# Altium PCB 8088NoteBook2.PcbDoc (part 2 of 2)
Units mm, origin at the board's own origin, x right, y up, seen from the top; angles counter-clockwise.
Board outline 60 x 75.5 mm, 4 copper layers (Top Layer, MidLayer1, GND, Bottom Layer); 109 components, 230 nets, 889 pads, 406 vias.
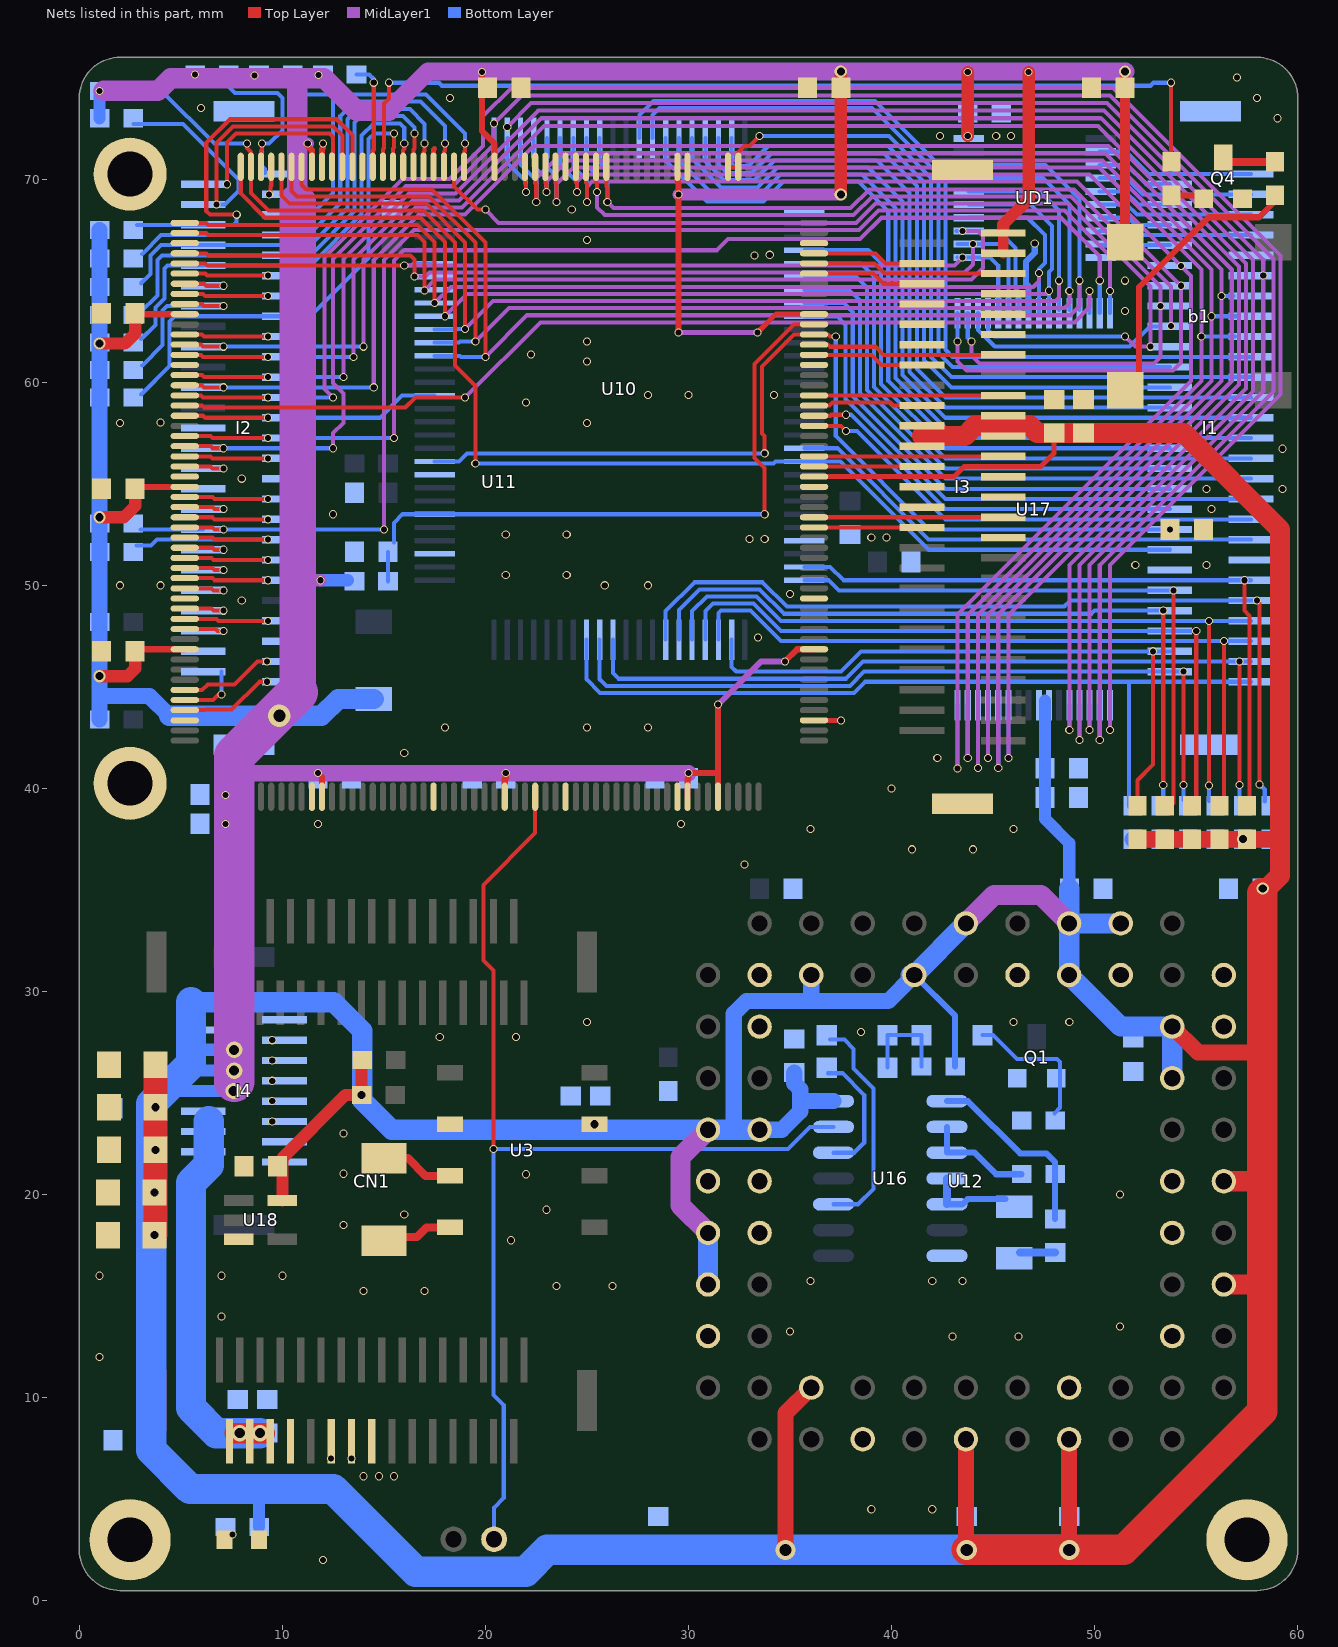
[diagram p4: the nets of this part, all layers, seen from the top]

## Via types
v1: diameter 0.4, hole 0.3, Top Layer to Bottom Layer, 379 vias
v2: diameter 0.6, hole 0.4, Top Layer to Bottom Layer, 17 vias
v3: diameter 0.8, hole 0.5, Top Layer to Bottom Layer, 5 vias
v4: diameter 1, hole 0.6, Top Layer to Bottom Layer, 3 vias
v5: diameter 1.1, hole 0.6, Top Layer to Bottom Layer, 1 vias
v6: diameter 0.55, hole 0.4, Top Layer to Bottom Layer, 1 vias

## Nets (pads, with @x,y where several pads share a name; then routed paths per layer and width w, separated by ;. In a path a pad name is that pad's centre, name@x,y a point inside that pad or via, vN(x,y) a via of type N, cw(c..) or ccw(c..) an arc to the next point about the centre after c; other vN are vias at no path point) (continued)
GND: C1.2 C3.2 C5.1 C8.2 C9.2 CN1.22 CN1.23 CN1.24 CV1.2 CV2.2 CV3.2 CV4.2 CV6.2 CV8.2 CV9.2 CV10.2 CV12.2 CV13.2 CV14.2 CV15.2 CV16.2 CV18.2 CV19.2 CV20.2 CV21.2 CV22.2 CV23.2 CV24.2 CV25.2 CV27.2 CV28.2 CV29.2 CV30.2 CV31.2 CV32.2 CV33.2 CV35.2 CV36.2 CV39.2 CV40.2 CV42.2 CV43.2 CV44.2 CV49.2 CV50.2 I1.0 I1.5 I1.20 I1.32 I2.0 I2.16 I2.24 I2.28 I2.36 I2.39 I3.0 I3.11 I3.13 I3.14 I3.21 I3.22 I3.23 I3.30 I3.31 I3.32 I3.39 I3.40 I4.1 I4.2 I4.3 I4.4 I4.5 I4.6 I4.7 I4.8 LED1.2 M1.1 M2.1 M3.1 M4.1 Q1.E Q4.E R11.1 R22.1 U3.2 U10.3 U10.9 U10.52 U10.77 U11.3 U11.15 U11.26 U11.38 U11.50 U11.60 U11.72 U11.85 U11.96 U11.107 U11.119 U11.130 U11.142 U11.154 U11.164 U11.176 U11.189 U11.200 U12.5 U12.14 U12.21 U12.25 U12.27 U12.32 U12.34 U12.38 U12.42 U12.53 U12.55 U12.60 U12.61 U12.63 U12.66 U16.7 U17.24 U18.3 UD1.10 | length 6.8
  Top Layer w0.25: U11.189@17.45,70.608 17.45,71.464 17.492,71.506 ; U11.107@36.475,43.35 v1(37.5,43.35)
  Top Layer w0.3: U11.200@11.95,70.608 11.95,71.475 12,71.525 v1(12,71.75)
  Bottom Layer w0.3: U17.24@46.75,63.4 46.75,64.725 46.625,64.85 46.625,65.95 47.05,66.375 v1(47.05,66.825)
  other v1: 12,2 39,4.5 42,4.5 14,6.125 14.75,6.125 15.5,6.125 12.4,7 13.4,7 1,12 43,13 46.25,13 35,13.25 51.25,13.5 7,14 14,15.25 17,15.25 23.5,15.5 26.25,15.5 36,15.75 42,15.75 43.5,15.75 1,16 7,16 10,16 21.25,17.75 13,18.5 16,19.025 23,19.25 51.25,20 22,21 13,21.025 13,23 9.5,23.6 9.5,24.6 9.5,25.6 9.5,26.6 9.5,27.6 17.75,27.75 21.5,27.75 38.5,28 25,28.5 46,28.5 48.75,28.5 32.75,36.25 41,37 44,37 36,38 46,38 11.75,38.25 29.625,38.25 40,40 42.25,41.5 16,41.75 18,43 25,43 28,43 33.425,47.425 8,49.25 35,49.575 2,50 4,50 25.875,50 28,50 21,50.5 24,50.5 52,51 55.5,51 33,52.275 33.75,52.275 39,52.35 39.75,52.35 21,52.5 24,52.5 12.5,53.5 55.75,53.75 55.5,54.75 59.25,54.75 8,55.25 59.25,56.725 2,58 25,58 4,58.025 22,59 28,59.375 30,59.375 34.2,59.375 25,61.025 22.25,61.375 25,62 51.5,63.5 51.5,65 33.25,66.25 34,66.275 25,67 24.25,68.5 42.375,72.125 45.15,72.125 45.875,72.125 59,73 6,73.5 18.25,74 58,74 57,75
ISA_*DACK0: I2.47 R39.2 U11.192 | length 22.9
  Top Layer w0.2: U11.192@15.95,70.608 15.95,71.425 16,71.475 v1(16,71.75)
  Bottom Layer w0.2: R39.2@3.05,62.125 3.75,62.825 3.75,63.675 4.2,64.125 4.2,65.6 4.35,65.75 I2.47@6.1,65.75 ; I2.47@6.2,65.75 11.375,65.75 13.9,68.275 13.9,72.15 14.5,72.75 15.797,72.75 16,72.547 v1(16,71.75)
ISA_*DACK1: I1.40 U10.47 | length 35
  Bottom Layer w0.2: U10.47@30.825,72.025 30.825,70.875 31.75,69.95 33.25,69.95 34.225,70.925 39.269,70.925 40.885,69.309 40.885,60.515 42.65,58.75 I1.40@53.7,58.75
ISA_*DACK2: I1.12 U10.48 | length 38.4
  Bottom Layer w0.2: U10.48@31.475,72.025 31.475,70.725 31.9,70.3 33.1,70.3 34.075,71.275 39.625,71.275 41.241,69.659 41.241,60.659 42.65,59.25 I1.12@57.7,59.25
ISA_*DACK3: I1.41 U10.49 | length 33.3
  Bottom Layer w0.2: U10.49@32.125,72.025 32.125,70.775 32.25,70.65 32.95,70.65 33.925,71.625 39.825,71.625 41.6,69.85 41.6,61.1 42.95,59.75 I1.41@53.7,59.75
ISA_*IOCHCK: I2.45 R41.2 U11.9 | length 7.2
  Top Layer w0.2: U11.9@5.192,63.85 6.05,63.85 6.15,63.75 v1(7.1,63.75)
  Bottom Layer w0.2: R41.2@3.1,60.825 4.1,61.825 4.1,63.53 4.32,63.75 I2.45@6.1,63.75
ISA_*IOR: I2.49 R30.2 U11.197 | length 19.8
  Top Layer w0.2: v1(7.75,68.25) 6.425,68.25 6.25,68.425 6.25,71.775 7.425,72.95 12.675,72.95 13.45,72.175 U11.197@13.45,70.608
  Bottom Layer w0.2: R30.2@2.85,67.75 7.6,67.75 7.75,67.9 v1(7.75,68.25)
ISA_*IOW: I2.50 R31.2 U11.198 | length 19.5
  Top Layer w0.2: v1(6.75,68.75) 6.75,71.775 7.575,72.6 12.5,72.6 12.95,72.15 U11.198@12.95,70.608
  Bottom Layer w0.2: R31.2@2.675,72.725 5.1,72.725 7.85,69.975 7.85,69.425 7.175,68.75 v1(6.75,68.75)
ISA_*MEMR: I2.48 R32.2 U11.190 | length 23
  Top Layer w0.2: U11.190@16.95,70.608 16.95,71.325 17,71.375 v1(17,71.75)
  Bottom Layer w0.2: R32.2@3.05,64.875 3.5,65.325 3.5,66.23 4.02,66.75 11.375,66.75 13.2,68.575 13.2,72.95 13.7,73.45 16.275,73.45 17,72.725 v1(17,71.75)
ISA_*MEMW: I2.5 R33.2 U11.191 | length 23.3
  Top Layer w0.2: U11.191@16.45,70.608 16.45,71.45 16.5,71.5 v1(16.5,72.25)
  Bottom Layer w0.2: R33.2@3,63.425 3.85,64.275 3.85,66.025 4.075,66.25 11.375,66.25 13.55,68.425 13.55,72.784 13.866,73.1 15.942,73.1 16.5,72.542 v1(16.5,72.25)
ISA_A0: I1.43 U11.187 U17.20 | length 50.2
  Top Layer w0.2: U11.187@18.45,70.608 18.45,69.65 19.6,68.5 v1(20,68.5)
  MidLayer1 w0.2: v1(20,68.5) 20.65,67.85 38.25,67.85 39.2,68.8 48.675,68.8 52.75,64.725 v1(52.75,61.75) 52,61.75 v1(51.5,62.25)
  Bottom Layer w0.2: U17.20@44.75,63.4 44.75,62.575 45.075,62.25 v1(51.5,62.25)
ISA_A1: I1.44 U10.39 U11.172 U17.19 | length 47.7
  Top Layer w0.2: U11.172@25.95,70.608 25.95,69.625 26,69.575 v1(26,68.875)
  MidLayer1 w0.2: v1(26,68.875) 26.3,68.575 37.975,68.575 38.9,69.5 48.975,69.5 53.75,64.725 v1(53.75,62.775)
  Bottom Layer w0.2: U10.39@25.625,72.025 25.625,70.85 26,70.475 v1(26,68.875) ; U17.19@44.25,63.4 44.25,62.579 45.079,61.75 51.725,61.75 52.725,62.75 I1.44@53.125,62.75
ISA_A2: I1.45 U10.38 U11.173 U17.18 | length 50.3
  Top Layer w0.2: U11.173@25.45,70.608 25.45,69.825 25.5,69.775 v1(25.5,69.375)
  MidLayer1 w0.2: v1(25.5,69.375) 25.5,68.6 25.875,68.225 38.125,68.225 39.05,69.15 48.825,69.15 53.25,64.725 53.25,61.25 52.925,60.925 44.325,60.925 43.925,61.325 v1(43.925,62)
  Bottom Layer w0.2: U10.38@24.975,72.025 24.975,70.7 25.5,70.175 v1(25.5,69.375) ; U17.18@43.75,63.4 43.75,62.175 v1(43.925,62)
  other v1: 53.25,63.75
ISA_A3: I1.46 U10.37 U11.174 U17.17 | length 54.9
  Top Layer w0.2: U11.174@24.95,70.608 24.95,69.825 25,69.775 v1(25,68.875)
  MidLayer1 w0.2: v1(25,68.875) 25,69.625 25.25,69.875 49.125,69.875 v1(54.25,64.75) 54.25,60.975 53.85,60.575 43.7,60.575 43.25,61.025 v1(43.25,62)
  Bottom Layer w0.2: U10.37@24.325,72.025 24.325,70.6 25,69.925 v1(25,68.875) ; v1(43.25,62) U17.17@43.25,63.4
ISA_A4: I1.47 U10.36 U11.175 U17.16 | length 69.3
  Top Layer w0.2: U11.175@24.45,70.608 24.45,69.825 24.5,69.775 v1(24.5,69.375)
  MidLayer1 w0.2: v1(24.5,69.375) 24.5,69.875 24.85,70.225 49.75,70.225 54.75,65.225 54.75,60.059 43.25,48.559 v1(43.25,40.975)
  Bottom Layer w0.2: U10.36@23.675,72.025 23.675,70.675 24.5,69.85 v1(24.5,69.375) ; v1(43.25,40.975) U17.16@43.25,44.1
  other v1: 54.25,65.725
ISA_A5: I1.9 U10.35 U11.177 U17.15 | length 73.2
  Top Layer w0.2: U11.177@23.45,70.608 23.45,69.8 23.5,69.75 v1(23.5,68.875)
  MidLayer1 w0.2: v1(23.5,68.875) 23.5,69.75 24.325,70.575 50.225,70.575 55.25,65.55 55.25,60.05 54.202,59.002 43.75,48.55 v1(43.75,41.5)
  Bottom Layer w0.2: U10.35@23.025,72.025 23.025,70.6 23.5,70.125 v1(23.5,68.875) ; v1(43.75,41.5) U17.15@43.75,44.1 ; v1(55.25,62.25) I1.9@56.9,62.25
ISA_A6: I1.8 U10.34 U11.178 U17.14 | length 73.7
  Top Layer w0.2: U11.178@22.95,70.608 22.95,69.8 23,69.75 v1(23,69.375)
  MidLayer1 w0.2: v1(23,69.375) 23,69.875 24.05,70.925 50.375,70.925 55.75,65.55 55.75,60.05 44.25,48.55 v1(44.25,41)
  Bottom Layer w0.2: U10.34@22.375,72.025 22.375,70.65 23,70.025 v1(23,69.375) ; v1(44.25,41) U17.14@44.25,44.1 ; v1(55.75,63.25) I1.8@57,63.25
ISA_A7: I1.7 U10.33 U11.179 U17.13 | length 75
  Top Layer w0.2: U11.179@22.45,70.608 22.45,69.8 22.5,69.75 v1(22.5,68.875)
  MidLayer1 w0.2: v1(22.5,68.875) 22.5,70.025 23.75,71.275 50.525,71.275 56.25,65.55 56.25,60.05 44.75,48.55 v1(44.75,41.5)
  Bottom Layer w0.2: U10.33@21.725,72.025 21.725,70.725 22.5,69.95 v1(22.5,68.875) ; v1(44.75,41.5) U17.13@44.75,44.1 ; v1(56.25,64.25) I1.7@56.825,64.25
ISA_A8: I1.6 U10.32 U11.180 U17.3 | length 73.1
  Top Layer w0.2: U11.180@21.95,70.608 21.95,69.775 22,69.725 v1(22,69.375)
  MidLayer1 w0.2: v1(21.075,72.575) 22.25,73.75 50.6,73.75 58.3,66.05 58.3,59.55 49.75,51 v1(49.75,42.875)
  Bottom Layer w0.2: U10.32@21.075,72.025 21.075,70.8 22,69.875 v1(22,69.375) ; v1(49.75,42.875) U17.3@49.75,44.1
  other v1: 58.3,65.25
ISA_A9: I2.38 U10.31 U11.23 U17.2 | length 99.7
  Top Layer w0.2: U11.23@5.1,56.85 6.45,56.85 6.55,56.75 v1(7.1,56.75)
  MidLayer1 w0.2: v1(12.5,56.75) 12.5,57.5 13,58 13,59.45 12.5,59.95 12.5,66.075 16.075,69.65 18.38,69.65 20.425,71.695 v1(20.425,72.75) 21.8,74.125 50.75,74.125 58.8,66.075 58.8,59.55 50.25,51 v1(50.25,42.375)
  Bottom Layer w0.2: v1(7.1,56.75) v1(12.5,56.75) ; v1(50.25,42.375) U17.2@50.25,44.1
ISA_A10: I2.14 U11.22 U17.31 | length 57.6
  Top Layer w0.2: U11.22@5.1,57.35 6.45,57.35 6.55,57.25 v1(9.3,57.25)
  MidLayer1 w0.2: v1(15.5,57.25) 15.5,66 16,66.5 31.4,66.5 31.95,67.05 38.45,67.05 39.5,68.1 48.35,68.1 50.25,66.2 v1(50.25,65)
  Bottom Layer w0.2: I2.14@10.1,57.25 v1(15.5,57.25) ; U17.31@50.25,63.4 v1(50.25,65)
ISA_A11: I2.12 U11.18 U17.1 | length 96.5
  Top Layer w0.2: U11.18@5.192,59.35 6,59.35 6.1,59.25 v1(9.3,59.25)
  MidLayer1 w0.2: v1(12.5,59.25) 12.075,59.675 12.075,66.15 15.925,70 18.235,70 19.875,71.64 19.875,73.1 21.275,74.5 50.9,74.5 59.15,66.25 59.15,59.4 50.75,51 v1(50.75,42.875)
  Bottom Layer w0.2: I2.12@10.1,59.25 v1(12.5,59.25) ; v1(50.75,42.875) U17.1@50.75,44.1
ISA_A12: I2.41 U11.17 U17.12 | length 95.1
  Top Layer w0.2: U11.17@5.192,59.85 6.05,59.85 6.15,59.75 v1(7.1,59.75)
  MidLayer1 w0.2: v1(14.5,59.75) 14.5,66.025 16.725,68.25 19,68.25 22.375,71.625 50.675,71.625 56.75,65.55 56.75,60.05 45.25,48.55 v1(45.25,41)
  Bottom Layer w0.2: v1(7.1,59.75) v1(14.5,59.75) ; v1(45.25,41) U17.12@45.25,44.1
ISA_A13: I2.11 U11.16 U17.4 | length 92.7
  Top Layer w0.2: U11.16@5.192,60.35 6.05,60.35 6.15,60.25 v1(9.3,60.25)
  MidLayer1 w0.2: v1(13,60.25) 13,66.075 16.225,69.3 18.525,69.3 22.6,73.375 50.45,73.375 57.8,66.025 57.8,59.55 49.25,51 v1(49.25,42.375)
  Bottom Layer w0.2: I2.11@10.1,60.25 v1(13,60.25) ; v1(49.25,42.375) U17.4@49.25,44.1
ISA_A14: I2.10 U11.14 U17.5 | length 89.9
  Top Layer w0.2: U11.14@5.192,61.35 6,61.35 6.1,61.25 v1(9.3,61.25)
  MidLayer1 w0.2: v1(13.5,61.25) 13.5,66.05 16.4,68.95 18.7,68.95 22.75,73 50.3,73 57.45,65.85 57.45,59.7 48.75,51 v1(48.75,42.875)
  Bottom Layer w0.2: I2.10@10.1,61.25 v1(13.5,61.25) ; v1(48.75,42.875) U17.5@48.75,44.1
ISA_A15: I2.43 U11.13 U17.11 | length 93.3
  Top Layer w0.2: U11.13@5.192,61.85 6,61.85 6.1,61.75 v1(7.1,61.75)
  MidLayer1 w0.2: v1(14,61.75) 14,66.05 16.55,68.6 18.85,68.6 22.875,72.625 50.175,72.625 57.1,65.7 57.1,59.885 45.75,48.535 v1(45.75,41.5)
  Bottom Layer w0.2: v1(7.1,61.75) v1(14,61.75) ; v1(45.75,41.5) U17.11@45.75,44.1
ISA_A16: I2.9 U11.12 | length 4.1
  Top Layer w0.2: U11.12@5.192,62.35 6.05,62.35 6.15,62.25 v1(9.3,62.25)
ISA_A17: I2.7 U11.8 | length 4.1
  Top Layer w0.2: U11.8@5.192,64.35 6.1,64.35 6.2,64.25 v1(9.3,64.25)
ISA_A18: I2.46 U11.7 | length 1.9
  Top Layer w0.2: U11.7@5.192,64.85 6.15,64.85 6.25,64.75 v1(7.1,64.75)
ISA_A19: I2.6 U11.6 | length 4.1
  Top Layer w0.2: U11.6@5.192,65.35 6.2,65.35 6.3,65.25 v1(9.3,65.25)
ISA_AEN: I2.2 U11.205 | length 1.4
  Top Layer w0.2: v1@9.425,69.25 9.425,69.65 9.45,69.675 U11.205@9.45,70.608
  other v1: 9.35,69.25
ISA_ALE: I2.51 U11.199 | length 9
  Top Layer w0.2: v1(7.275,69.75) 7.275,71.8 7.725,72.25 12.325,72.25 12.5,72.075 12.5,71.325 12.45,71.275 U11.199@12.45,70.608
ISA_B8: I2.4 R29.2 U11.188 | length 23
  Top Layer w0.2: U11.188@17.95,70.608 17.95,71.35 18,71.4 v1(18,71.75)
  Bottom Layer w0.2: R29.2@3.1,66.325 4.025,67.25 11.275,67.25 12.85,68.825 12.85,73.1 13.575,73.825 16.8,73.825 18,72.625 v1(18,71.75)
ISA_CLK86: I2.13 U10.15 U11.20 | length 12
  Top Layer w0.2: U11.20@5.192,58.35 6.1,58.35 6.2,58.25 v1(9.3,58.25)
  Bottom Layer w0.2: I2.13@10.1,58.25 14.8,58.25 15.9,59.35 U10.15@17.5,59.35
ISA_D0: I1.48 UD1.9 | length 3.4
  Bottom Layer w0.2: UD1.9@50.25,66.75 I1.48@53.7,66.75
ISA_D1: I1.4 UD1.8 | length 7.5
  Bottom Layer w0.2: UD1.8@50.25,67.45 51.75,67.45 51.95,67.25 I1.4@57.7,67.25
ISA_D2: I1.49 UD1.7 | length 3.6
  Bottom Layer w0.2: UD1.7@50.25,68.1 51.65,68.1 52,67.75 I1.49@53.7,67.75
ISA_D3: I1.3 UD1.6 | length 7.7
  Bottom Layer w0.2: UD1.6@50.25,68.75 51.575,68.75 52.075,68.25 I1.3@57.7,68.25
ISA_D4: I1.50 UD1.5 | length 3.7
  Bottom Layer w0.2: UD1.5@50.25,69.4 51.5,69.4 52.15,68.75 I1.50@53.7,68.75
ISA_D5: I1.2 UD1.4 | length 7.8
  Bottom Layer w0.2: UD1.4@50.25,70.05 51.575,70.05 52.375,69.25 I1.2@57.7,69.25
ISA_D6: I1.51 UD1.3 | length 3.8
  Bottom Layer w0.2: UD1.3@50.25,70.7 51.575,70.7 52.525,69.75 I1.51@53.7,69.75
ISA_D7: I1.1 UD1.2 | length 7.9
  Bottom Layer w0.2: UD1.2@50.25,71.35 51.55,71.35 52.65,70.25 I1.1@57.7,70.25
ISA_D8: I2.33 U11.33 | length 2
  Top Layer w0.2: U11.33@5.1,51.85 6.55,51.85 6.65,51.75 v1(7.1,51.75)
ISA_D9: I2.20 U11.34 | length 4.2
  Top Layer w0.2: U11.34@5.1,51.35 6.5,51.35 6.6,51.25 v1(9.3,51.25)
ISA_D10: I2.30 U11.39 | length 2
  Top Layer w0.2: U11.39@5.1,48.85 6.5,48.85 6.6,48.75 v1(7.1,48.75)
ISA_D11: I2.23 U11.40 | length 4.2
  Top Layer w0.2: U11.40@5.1,48.35 6.75,48.35 6.85,48.25 v1(9.3,48.25)
ISA_D12: I2.29 U11.41 | length 2
  Top Layer w0.2: U11.41@5.1,47.85 6.7,47.85 6.8,47.75 v1(7.1,47.75)
ISA_D13: I2.25 U11.47 | length 4.6
  Top Layer w0.2: U11.47@5.192,44.85 6.05,44.85 6.325,45.125 7.65,45.125 8.775,46.25 v1(9.25,46.25)
ISA_D14: I2.27 U11.48 | length 3
  Top Layer w0.203: U11.48@5.192,44.35 6.575,44.35 6.85,44.625 v1(7,44.625)
  Bottom Layer w0.203: v1(7,44.625) I2.27@7,45.75
ISA_D15: I2.26 U11.49 | length 4.6
  Top Layer w0.2: U11.49@5.192,43.85 6.175,43.85 6.2,43.875 7.5,43.875 8.875,45.25 v1(9.25,45.25)
ISA_DRQ1: I1.42 U10.43 | length 37.2
  Bottom Layer w0.2: U10.43@28.225,72.025 28.225,73.15 28.575,73.5 39.025,73.5 42.3,70.225 42.3,61.45 43,60.75 I1.42@53.7,60.75
ISA_DRQ2: I1.14 U10.44 | length 41.3
  Bottom Layer w0.2: U10.44@28.875,72.025 28.875,70.925 30.9,68.9 33.7,68.9 34.675,69.875 38.375,69.875 39.835,68.415 39.835,60.065 42.65,57.25 I1.14@57.7,57.25
ISA_DRQ3: I1.39 U10.45 | length 36.4
  Bottom Layer w0.2: U10.45@29.525,72.025 29.525,70.925 31.2,69.25 33.55,69.25 34.525,70.225 38.534,70.225 40.185,68.574 40.185,60.215 42.65,57.75 I1.39@53.7,57.75
ISA_IOREADY: I1.33 R40.2 U10.71 U11.207 | length 67.6
  Top Layer w0.2: v1(8.25,71.75) 8.25,71.525 8.45,71.325 8.45,69.325 9.325,68.45 16.94,68.45 18.5,66.89 18.5,60.825 19.5,59.825 v1(19.5,56)
  Bottom Layer w0.2: R40.2@2.651,74.35 4.05,74.35 6.65,71.75 v1(8.25,71.75) ; v1(19.5,56) 34.175,56 34.275,56.1 37.48,56.1 41.83,51.75 I1.33@53.7,51.75
ISA_IRQ2: I1.23 R42.2 U10.85 | length 38.6
  Top Layer w0.2: v1(55.625,40.15) v1(55.625,48.25)
  Bottom Layer w0.2: U10.85@30.175,47.325 30.175,48.725 30.9,49.45 33.35,49.45 34.55,48.25 I1.23@57.7,48.25 ; R42.2@55.625,39.375 v1(55.625,40.15)
ISA_IRQ3: I1.26 R43.2 U10.93 | length 41.3
  Bottom Layer w0.2: U10.93@24.975,47.325 24.975,45.375 25.65,44.7 38.15,44.7 38.7,45.25 I1.26@57.7,45.25 ; R43.2@51.7,39.101 51.7,45.2
ISA_IRQ4: I1.27 R44.2 U10.92 | length 37.1
  Top Layer w0.2: v1(54.375,40.175) v1(54.375,45.75)
  Bottom Layer w0.2: U10.92@25.625,47.325 25.625,45.375 25.95,45.05 37.95,45.05 38.65,45.75 I1.27@53.7,45.75 ; I1.27@54,45.75 v1(54.375,45.75) ; R44.2@54.375,39.425 v1(54.375,40.175)
ISA_IRQ5: I1.25 R45.2 U10.91 | length 40.2
  Top Layer w0.2: v1(57.125,40.175) v1(57.125,46.25)
  Bottom Layer w0.2: U10.91@26.275,47.325 26.275,45.675 26.55,45.4 37.75,45.4 38.6,46.25 I1.25@57.7,46.25 ; R45.2@57.125,39.6 v1(57.125,40.175)
ISA_IRQ6: I1.22 R46.2 U10.87 | length 41.8
  Top Layer w0.2: v1(58,49.25) 58.125,49.125 v1(58.125,40.2)
  Bottom Layer w0.2: U10.87@28.875,47.325 28.875,48.725 30.3,50.15 33.65,50.15 34.85,48.95 48.5,48.95 48.8,49.25 v1(58,49.25) ; v1(58.125,40.2) 58.375,39.95 R46.2@58.375,39.35
ISA_IRQ7: I1.30 R47.2 U10.86 | length 35.8
  Top Layer w0.2: v1(53.375,40.175) v1(53.375,48.75)
  Bottom Layer w0.2: U10.86@29.525,47.325 29.525,48.775 30.55,49.8 33.5,49.8 34.7,48.6 49.85,48.6 50,48.75 v1(53.375,48.75) ; R47.2@53.375,39.276 v1(53.375,40.175)
ISA_OSC: I1.11 U11.159 U11.160 | length 36.9
  Top Layer w0.2: U11.160@31.95,70.608 U11.159@32.45,70.608 32.45,71.325 32.75,71.625 33,71.625 v1(33.5,72.125)
  Bottom Layer w0.2: v1(33.5,72.125) 39.875,72.125 41.95,70.05 41.95,61.25 42.95,60.25 I1.11@57.7,60.25
ISA_RESET: C1.1 I1.34 U10.10 U11.145 | length 48.3
  Top Layer w0.2: v1(33.75,56.5) 33.75,57.35 33.625,57.475 33.625,60.775 35.2,62.35 36.875,62.35 36.975,62.25 v1(37.25,62.25)
  Bottom Layer w0.2: U10.10@17.5,56.1 18.7,56.1 19.1,56.5 v1(33.75,56.5) ; v1(37.25,62.25) 37.25,57.35 41.85,52.75 v1(53.7,52.75)
ISA_T/C: I1.19 U10.70 | length 23.9
  Bottom Layer w0.2: U10.70@35.7,56.75 37.325,56.75 41.825,52.25 I1.19@57.7,52.25
ISAC_*BHE: I2.15 U11.24 | length 4.2
  Top Layer w0.2: U11.24@5.1,56.35 6.45,56.35 6.55,56.25 v1(9.3,56.25)
ISAC_*MEMR: I2.34 R34.2 U11.31 U17.32 | length 66.8
  Top Layer w0.2: U11.31@5.1,52.85 6.55,52.85 6.65,52.75 v1(7.1,52.75)
  MidLayer1 w0.2: v1(15,52.75) 15,66.025 16.475,67.5 38.4,67.5 39.35,68.45 48.525,68.45 50.75,66.225 v1(50.75,64.5)
  Bottom Layer w0.2: R34.2@3.025,52.75 I2.34@6.1,52.75 ; v1(7.1,52.75) v1(15,52.75) ; U17.32@50.75,63.4 v1(50.75,64.5)
ISAC_*MEMW: I2.19 R35.2 U11.32 | length 10.8
  Top Layer w0.2: U11.32@5.1,52.35 6.55,52.35 6.65,52.25 v1(9.3,52.25)
  Bottom Layer w0.2: R35.2@2.825,51.95 3.525,51.95 3.825,52.25 v1(9.3,52.25)
ISAC_A17: I2.31 U11.37 | length 2
  Top Layer w0.2: U11.37@5.1,49.85 6.5,49.85 6.6,49.75 v1(7.1,49.75)
ISAC_A18: I2.21 U11.36 | length 4.2
  Top Layer w0.2: U11.36@5.1,50.35 6.55,50.35 6.65,50.25 v1(9.3,50.25)
ISAC_A19: I2.32 U11.35 | length 2
  Top Layer w0.2: U11.35@5.1,50.85 6.55,50.85 6.65,50.75 v1(7.1,50.75)
ISAC_A20: I2.18 U11.30 | length 4.2
  Top Layer w0.2: U11.30@5.1,53.35 6.55,53.35 6.65,53.25 v1(9.3,53.25)
ISAC_A21: I2.35 U11.29 | length 2
  Top Layer w0.2: U11.29@5.1,53.85 6.55,53.85 6.65,53.75 v1(7.1,53.75)
ISAC_A22: I2.17 U11.28 | length 4.2
  Top Layer w0.2: U11.28@5.1,54.35 6.55,54.35 6.65,54.25 v1(9.3,54.25)
ISAC_A23: I2.37 U11.25 | length 2
  Top Layer w0.2: U11.25@5.1,55.85 6.45,55.85 6.55,55.75 v1(7.1,55.75)
ISAD_*DACK0: I1.13 U10.46 | length 39.6
  Bottom Layer w0.2: U10.46@30.175,72.025 30.175,71.025 31.6,69.6 33.4,69.6 34.375,70.575 38.85,70.575 40.535,68.89 40.535,60.365 42.65,58.25 I1.13@57.7,58.25
ISAD_*DACK5: I1.37 U10.57 | length 24.9
  Bottom Layer w0.2: U10.57@35.7,65.2 38.25,65.2 38.785,64.665 38.785,59.615 42.65,55.75 I1.37@53.7,55.75
ISAD_*DACK6: I1.15 U10.56 | length 29.2
  Bottom Layer w0.2: U10.56@35.7,65.85 38.5,65.85 39.135,65.215 39.135,59.765 42.65,56.25 I1.15@57.7,56.25
ISAD_*DACK7: I1.38 U10.55 | length 25.5
  Bottom Layer w0.2: U10.55@35.7,66.5 38.85,66.5 39.485,65.865 39.485,59.915 42.65,56.75 I1.38@53.7,56.75
ISAD_*IOCS16: I2.3 R36.2 U11.186 | length 19.5
  Top Layer w0.2: U11.186@18.95,70.608 18.95,71.325 19,71.375 v1(19,71.75)
  Bottom Layer w0.2: I2.3@10.1,68.25 11.425,68.25 12.5,69.325 12.5,74.175 ; R36.2@10.501,75.15 10.501,74.374 10.7,74.175 17.075,74.175 19,72.25 v1(19,71.75)
ISAD_*MASTER: I2.8 R38.2 U11.193 | length 24.2
  Top Layer w0.2: U11.193@15.45,70.608 15.45,71.5 15.5,71.55 v1(15.5,72.25)
  Bottom Layer w0.2: R38.2@3.05,59.4 4.45,60.8 4.45,63 4.7,63.25 11.375,63.25 14.25,66.125 14.25,71.975 14.525,72.25 v1(15.5,72.25)
ISAD_*MEMCS16: I2.1 R37.2 U11.206 | length 9
  Top Layer w0.2: U11.206@8.95,70.608 8.95,71.4 9,71.45 v1(9,71.75)
  Bottom Layer w0.2: R37.2@7.351,75.15 7.351,74.574 7.675,74.25 9.75,74.25 10,74 10,72.4 9.35,71.75 v1(9,71.75) 9,70.65 9.15,70.5 I2.1@9.15,70.3
ISAD_DRQ0: I1.10 U10.42 | length 41.9
  Bottom Layer w0.2: U10.42@27.575,72.025 27.575,73.15 28.275,73.85 39.179,73.85 42.65,70.379 42.65,61.6 43,61.25 I1.10@57.7,61.25
ISAD_DRQ5: I1.17 U10.60 | length 27.9
  Bottom Layer w0.2: U10.60@35.7,63.25 37.3,63.25 37.735,62.815 37.735,59.165 42.65,54.25 I1.17@57.7,54.25
ISAD_DRQ6: I1.36 U10.59 | length 24.2
  Bottom Layer w0.2: U10.59@35.7,63.9 37.65,63.9 38.085,63.465 38.085,59.315 42.65,54.75 I1.36@53.7,54.75
ISAD_DRQ7: I1.16 U10.58 | length 28.5
  Bottom Layer w0.2: U10.58@35.7,64.55 37.9,64.55 38.435,64.015 38.435,59.465 42.65,55.25 I1.16@57.7,55.25
ISAD_IRQ10: I1.29 R14.2 U10.84 | length 34.8
  Top Layer w0.2: R14.2@55,39.275 v1(55,47.75)
  Bottom Layer w0.2: U10.84@30.825,47.325 30.825,48.725 31.2,49.1 33.2,49.1 34.55,47.75 v1(55,47.75)
ISAD_IRQ11: I1.24 R15.2 U10.83 | length 36
  Top Layer w0.2: R15.2@56.375,39.475 v1(56.375,47.25)
  Bottom Layer w0.2: U10.83@31.475,47.325 31.475,48.625 31.6,48.75 33.05,48.75 34.55,47.25 I1.24@57.7,47.25
ISAD_IRQ12: I1.28 R16.2 U10.82 | length 31.4
  Top Layer w0.2: R16.2@52.1,39.151 52.1,40.4 52.875,41.175 v1(52.875,46.75)
  Bottom Layer w0.2: U10.82@32.125,47.325 32.125,45.975 32.35,45.75 37.5,45.75 38.5,46.75 I1.28@53.7,46.75
ISAD_IRQ14: I1.31 R17.2 U10.80 | length 28.7
  Top Layer w0.2: R17.2@53.875,39.275 v1(53.875,49.75)
  Bottom Layer w0.2: U10.80@35.7,50.25 36.9,50.25 37.4,49.75 I1.31@53.7,49.75
ISAD_IRQ15: I1.21 R19.2 U10.79 | length 33.2
  Top Layer w0.2: v1(57.375,50.25) 57.375,48.75 57.625,48.5 R19.2@57.625,39.4
  Bottom Layer w0.2: U10.79@35.7,50.9 36.975,50.9 37.625,50.25 I1.21@57.7,50.25
J5_386/486: JPx.1 U11.82 U16.13 | length 55.4
  Top Layer w0.2: v1(20.4,22.25) 20.4,31.025 19.9,31.525 19.9,35.25 22.45,37.8 U11.82@22.45,39.592
  Bottom Layer w0.2: JPx.1@20.425,3.025 20.425,4.575 20.9,5.05 20.9,9.625 20.4,10.125 v1(20.4,22.25) 34.9,22.25 35.98,23.33 U16.13@37.137,23.33
KEY_A: I1.18 U11.136 | length 23.4
  Top Layer w0.2: U11.136@36.18,57.85 37.5,57.85 v1(37.75,57.6)
  Bottom Layer w0.2: v1(37.75,57.6) 38.3,57.6 42.65,53.25 I1.18@57.7,53.25
KEY_B: I1.35 U11.137 | length 19.5
  Top Layer w0.2: U11.137@36.18,58.35 37,58.35 37.05,58.4 v1(37.75,58.4)
  Bottom Layer w0.2: v1(37.75,58.4) 38.005,58.4 42.655,53.75 I1.35@53.7,53.75
MA0: I3.28 U11.153 | length 6
  Top Layer w0.2: U11.153@35.7,66.35 39.2,66.35 39.7,65.85 I3.28@41.5,65.85
MA1: I3.24 U11.152 | length 10
  Top Layer w0.2: U11.152@35.7,65.85 39.15,65.85 39.65,65.35 I3.24@45.5,65.35
MA2: I3.29 U11.151 | length 6
  Top Layer w0.2: U11.151@35.7,65.35 39.1,65.35 39.6,64.85 I3.29@41.5,64.85
MA3: I3.20 U11.144 | length 9.5
  Top Layer w0.2: 39.6,61.35 I3.20@45.5,61.35
  Top Layer w0.203: U11.144@36.18,61.85 36.875,61.85 36.975,61.75 39.2,61.75 39.6,61.35
MA4: I3.33 U11.143 | length 6
  Top Layer w0.2: U11.143@35.7,61.35 39,61.35 39.5,60.85 I3.33@41.5,60.85
MA5: I3.18 U11.139 | length 9.2
  Top Layer w0.2: U11.139@35.7,59.35 I3.18@44.9,59.35
MA6: I3.35 U11.138 | length 5.4
  Top Layer w0.2: U11.138@36.18,58.85 36.95,58.85 37.097,58.997 39.953,58.997 40.1,58.85 I3.35@41.5,58.85
MA7: I3.15 U11.133 | length 9.1
  Top Layer w0.2: U11.133@35.7,56.35 I3.15@44.8,56.35
MA8: I3.38 U11.132 | length 5.1
  Top Layer w0.2: U11.132@35.7,55.85 I3.38@40.8,55.85
MA9: I3.12 U11.127 | length 9.8
  Top Layer w0.2: U11.127@35.7,53.35 I3.12@45.5,53.35
MA10: I3.41 U11.126 | length 5.1
  Top Layer w0.2: U11.126@35.7,52.85 I3.41@40.8,52.85
NetC31_1: C31.1 R24.1 U16.1 | length 9.4
  Bottom Layer w0.3: U16.1@42.725,24.6 43.75,24.6 46.325,22.025 47.625,22.025 48.05,21.6 C31.1@48.05,18.8
NetC31_2: C31.2 X3.2 | length 1.7
  Bottom Layer w0.381: X3.2@46.326,17.15 C31.2@48.05,17.15
NetD1_A: D1.A D2.A R12.A R13.2 | length 4.8
  Bottom Layer w0.203: D2.A@39.8,26.25 D1.A@39.8,27.85 R12.A@41.475,27.85 ; R13.2@41.474,26.3 R12.A@41.474,27.849
NetD1_K: D1.K U16.10 | length 10.9
  Bottom Layer w0.203: D1.K@36.975,27.625 37.675,27.625 38.125,27.175 38.125,26.2 39.1,25.225 39.1,20.275 38.345,19.52 U16.10@37.137,19.52
NetD2_K: D2.K U16.12 | length 6.3
  Bottom Layer w0.203: D2.K@36.875,25.975 37.575,25.975 38.65,24.9 38.65,22.55 38.16,22.06 U16.12@37.137,22.06
NetLED1_1: LED1.1 RL1.1
  other v1: 7.55,3.25
NetQ1_B: Q1.B R11.2 R12.K | length 7
  Bottom Layer w0.203: R12.K@44.475,27.85 45,27.85 46.175,26.675 48.15,26.675 48.3,26.525 48.3,24.275 R11.2@48.025,24
NetQ4_B: Q4.B R26.1 | length 1.3
  Top Layer w0.3: R26.1@53.775,69.2 Q4.B@55.125,69.2
NetQ4_C: Q4.C R25.1 | length 2.6
  Top Layer w0.381: Q4.C@56.275,70.85 R25.1@58.875,70.85
NetR24_2: R24.2 U16.2 U16.3 | length 5.4
  Bottom Layer w0.3: U16.2@42.725,23.33 U16.3@42.725,22.06 44.09,22.06 45.15,21 R24.2@46.399,21
NetU3_3: U3.3 X4.1 | length 3.6
  Top Layer w0.4: X4.1@15.001,21.792 16.183,21.792 17.055,20.92 U3.3@18.254,20.92
NetU3_4: U3.4 X4.2 | length 2.6
  Top Layer w0.4: X4.2@15.85,17.9 16.625,17.9 17.105,18.38 U3.4@18.254,18.38
NetU16_4: U16.4 U16.5 X3.1 | length 4.3
  Bottom Layer w0.3: U16.5@42.725,19.52 43.495,19.52 43.75,19.775 X3.1@45.6,19.775
  Bottom Layer w0.381: U16.5@42.725,19.52 U16.4@42.725,20.79
PIPELINE: CN1.20
POWERGOOD: C9.1 RR.1 U10.6 U11.146 | length 32.2
  Top Layer w0.2: v1(33.75,53.5) 33.75,55.775 33.25,56.275 33.25,60.9 35.2,62.85 U11.146@36.18,62.85
  Bottom Layer w0.2: RR.1@15.2,50.2 C9.1@15.2,51.65 ; C9.1@15.5,52.1 15.5,53.075 15.925,53.5 U10.6@17.5,53.5 v1(33.75,53.5)
ROM_*CS: U11.19 U17.30 | length 48.5
  Top Layer w0.2: U11.19@5.192,58.85 6.05,58.85 6.15,58.75 16.05,58.75 16.55,59.25 v1(19,59.25)
  MidLayer1 w0.2: v1(19,59.25) 22.7,62.95 49,62.95 49.75,63.7 v1(49.75,64.5)
  Bottom Layer w0.2: U17.30@49.75,63.4 v1(49.75,64.5)
SD0: U10.25 U11.5 U17.21 UD1.11 | length 44.4
  Top Layer w0.2: U11.5@5.192,65.85 6.2,65.85 6.3,65.75 v1(16,65.75)
  MidLayer1 w0.2: v1(16,65.75) 43.1,65.75 v1(43.5,66.15)
  Bottom Layer w0.2: v1(16,65.75) 16.35,65.75 16.45,65.85 U10.25@17.5,65.85 ; UD1.11@43.25,66.15 44.85,66.15 45.25,65.75 U17.21@45.25,63.55
SD1: U10.24 U11.4 U17.22 UD1.12 | length 46.5
  Top Layer w0.2: U11.4@5.192,66.35 6.25,66.35 6.35,66.25 16.3,66.25 16.5,66.05 v1(16.5,65.2)
  MidLayer1 w0.2: v1(16.5,65.2) 17.05,65.2 17.25,65.4 43.6,65.4 44,65.8 v1(44,66.8)
  Bottom Layer w0.2: UD1.12@43.25,66.8 45.3,66.8 45.75,66.35 U17.22@45.75,63.55
SD2: U10.23 U11.2 U17.23 UD1.13 | length 51.5
  Top Layer w0.2: U11.2@5.192,67.35 6.25,67.35 6.35,67.25 16.655,67.25 17,66.905 v1(17,64.525)
  MidLayer1 w0.2: v1(17,64.525) 17.525,65.05 43.925,65.05 44.5,65.625 44.5,67.2 44.25,67.45 v1(43.5,67.45)
  Bottom Layer w0.2: UD1.13@43.2,67.45 45.275,67.45 46.11,66.615 46.11,64.615 46.25,64.475 U17.23@46.25,63.4
SD3: U10.22 U11.1 U17.25 UD1.14 | length 54.4
  Top Layer w0.2: U11.1@5.192,67.85 6.25,67.85 6.35,67.75 16.65,67.75 17.5,66.9 v1(17.5,63.9)
  MidLayer1 w0.2: v1(17.5,63.9) 18.3,64.7 46.975,64.7 47.25,64.975 v1(47.25,65.375)
  Bottom Layer w0.2: UD1.14@43.8,68.1 46.7,68.1 47.55,67.25 47.55,65.875 47.25,65.575 U17.25@47.25,63.4
SD4: U10.21 U11.208 U17.26 UD1.15 | length 55.2
  Top Layer w0.2: U11.208@7.95,70.608 7.95,69.3 9.15,68.1 16.795,68.1 18,66.895 v1(18,63.25)
  MidLayer1 w0.2: v1(18,63.25) 19.1,64.35 47.6,64.35 v1(47.757,64.507)
  Bottom Layer w0.2: UD1.15@43.8,68.75 46.85,68.75 47.9,67.7 47.9,65.575 47.75,65.425 U17.26@47.75,63.4
SD5: U10.20 U11.204 U17.27 UD1.16 | length 57.6
  Top Layer w0.2: U11.204@9.95,70.608 9.95,69.2 10.35,68.8 17.085,68.8 19,66.885 v1(19,62.625)
  MidLayer1 w0.2: v1(19,62.625) 20.375,64 48.075,64 48.25,64.175 v1(48.25,65)
  Bottom Layer w0.2: U10.20@17.5,62.6 18.575,62.6 18.6,62.625 v1(19,62.625) ; UD1.16@43.8,69.4 47.3,69.4 48.25,68.45 U17.27@48.25,63.55
SD6: U10.19 U11.203 U17.28 UD1.17 | length 59.5
  Top Layer w0.2: U11.203@10.45,70.608 10.45,69.425 10.725,69.15 17.23,69.15 19.5,66.88 v1(19.5,62)
  MidLayer1 w0.2: v1(19.5,62) 21.15,63.65 48.525,63.65 48.75,63.875 v1(48.75,64.5)
  Bottom Layer w0.2: U10.19@17.5,61.95 18.7,61.95 18.75,62 v1(19.5,62) ; UD1.17@43.8,70.05 47.45,70.05 48.75,68.75 U17.28@48.75,63.55
SD7: U10.18 U11.202 U17.29 UD1.18 | length 62.4
  Top Layer w0.2: U11.202@10.95,70.608 10.95,69.725 11.175,69.5 17.375,69.5 20,66.875 v1(20,61.25)
  MidLayer1 w0.2: v1(20,61.25) 22.05,63.3 48.8,63.3 49.25,63.75 v1(49.25,65)
  Bottom Layer w0.2: U10.18@17.5,61.3 18.75,61.3 18.8,61.25 v1(20,61.25) ; UD1.18@43.8,70.7 47.575,70.7 49.25,69.025 U17.29@49.25,63.55
SPEKER: R26.2 U11.194 | length 46.8
  Top Layer w0.203: U11.194@14.95,70.608 14.95,71.475 15,71.525 15,73.725 15.25,73.975 v1(15.25,74.75) ; R26.2@53.75,70.876 v1(53.75,74.75)
  Bottom Layer w0.203: v1(15.25,74.75) 17.7,74.75 17.85,74.6 52.75,74.6 52.9,74.75 v1(53.75,74.75)
SPEKER_OUT: b1.2 R25.2 | length 13.1
  Top Layer w0.3: b1.2@52.125,60.35 52.191,60.416 52.191,64.691 55.625,68.125 58.1,68.125 58.875,68.9 R25.2@58.875,69.199
TB_SW: R27.2 U11.195 | length 5.3
  Top Layer w0.203: U11.195@14.45,70.608 14.45,71.4 14.5,71.45 v1(14.5,74.75)
  Bottom Layer w0.203: R27.2@13.651,75.15 14.275,75.15 14.5,74.925 v1(14.5,74.75)
TBLED: U11.196
VCC: b1.1 CV1.1 CV2.1 CV3.1 CV4.1 CV6.1 CV8.1 CV12.1 CV13.1 CV14.1 CV15.1 CV16.1 CV18.1 CV19.1 CV20.1 CV21.1 CV22.1 CV23.1 CV24.1 CV25.1 CV27.1 CV28.1 CV29.1 CV30.1 CV31.1 CV32.1 CV33.1 CV35.1 CV36.1 CV40.1 CV42.1 CV44.1 CV49.1 CV50.1 D3.A I3.16 I3.17 I3.25 I3.26 I3.36 I3.37 I4.12 I4.13 I4.14 I4.15 R1.2 R5.2 R13.1 R14.1 R15.1 R16.1 R17.1 R19.1 R27.1 R28.1 R29.1 R30.1 R31.1 R32.1 R33.1 R34.1 R35.1 R36.1 R37.1 R38.1 R39.1 R40.1 R41.1 R42.1 R43.1 R44.1 R45.1 R46.1 R47.1 RL1.2 RN2_4.2 RR.2 U3.7 U11.10 U11.27 U11.43 U11.61 U11.79 U11.97 U11.100 U11.114 U11.131 U11.147 U11.165 U11.183 U11.201 U12.4 U12.9 U12.13 U12.22 U12.26 U12.31 U12.33 U12.37 U12.39 U12.40 U12.43 U12.46 U12.50 U12.58 U12.59 U12.62 U12.64 U16.14 U17.7 U17.8 U18.5 UD1.20 | length 592.5
  Top Layer w0.2: I3.25@44.625,66.35 I3.25@45.5,66.35
  Top Layer w0.25: v1(33.4,62.45) 34.3,63.35 U11.147@36.18,63.35 ; U11.131@36.18,55.35 43.075,55.35 43.575,55.85 47.35,55.85 48,56.5 CV29.1@48,57.5
  Top Layer w0.3: CV14.1@2.8,63.35 U11.10@5.192,63.35 ; CV49.1@2.85,46.85 U11.43@5.192,46.85 ; CV19.1@2.85,54.85 U11.27@5.192,54.85 ; v1(11.25,71.75) 11.25,71.625 11.45,71.425 U11.201@11.45,70.608 ; v1(11.75,40.75) 11.95,40.55 U11.61@11.95,39.592 ; v1(19.825,75.275) 19.825,72.375 20.45,71.75 U11.183@20.45,70.608 ; U11.79@20.95,39.592 20.95,40.45 21,40.5 v1(21,40.75) ; U11.165@29.45,70.608 29.45,69.875 29.5,69.825 v1(29.5,62.45) ; U11.97@29.95,39.592 29.95,40.45 30,40.5 v1(30,40.75) 31.45,40.75 ; U11.100@31.45,39.592 v1(31.45,44.125) ; v1(34.75,46.25) 35.35,46.85 U11.114@36.18,46.85
  Top Layer w0.5: I3.25@45.5,66.35 I3.26@45.5,67.35 ; b1.1@51.5,66.9 v2(51.5,75.3)
  Top Layer w0.6: v2(1,45.525) 2.375,45.525 2.75,45.9 CV49.1@2.75,46.75 ; v2(1,53.35) 2.2,53.35 2.75,53.9 CV19.1@2.75,54.75 ; v2(1,61.9) 2.25,61.9 2.75,62.4 CV14.1@2.75,63.4 ; U18.5@10,19.7 10,21.8 13.1,24.9 v2(13.899,24.9) R5.2@13.899,26.6 ; v2(37.5,69.25) v2(37.5,75.3) ; I3.37@41.5,57.025 I3.36@41.5,57.725 ; v1(43.75,72.134) v1(43.75,75.275) ; I3.26@45.5,67.35 45.5,67.775 46.75,69.025 v1(46.75,75.275)
  Top Layer w0.8: v4(34.775,2.5) 34.775,9.225 U12.4@36.04,10.49 ; v4@43.66,2.59 U12.9@43.66,7.95 ; v4@48.74,2.51 U12.13@48.74,7.95 ; R16.1@52.1,37.5 58.9,37.5 ; U12.33@53.82,28.27 55.09,27 57.675,27
  Top Layer w1: 41.5,57.35 43.6,57.35 44.1,57.85 46.825,57.85 47.175,57.5 54.375,57.5 59.125,52.75 59.125,35.7 v2@58.25,34.825 ; U12.22@56.36,15.57 57.77,15.57 ; U12.26@56.36,20.65 57.875,20.65
  Top Layer w1.2: CV6.1@3.75,18 CV4.1@3.75,26.4
  Top Layer w1.5: v4(43.7,2.5) 51.425,2.5 58.25,9.325 v2@58.25,34.825
  MidLayer1 w0.25: v1(29.5,62.45) v1(33.4,62.45)
  MidLayer1 w0.3: v1(31.45,44.125) 33.575,46.25 v1(34.75,46.25)
  MidLayer1 w0.6: 10.775,71.75 v1(11.25,71.75) ; 11.425,50.25 v1(11.875,50.25) ; v1(29.5,69.25) v2(37.5,69.25)
  MidLayer1 w0.8: 7.95,40.75 v1(30,40.75)
  MidLayer1 w0.9: 15.25,73.375 17.175,75.3 v2(51.5,75.3)
  MidLayer1 w1: 1.2,74.35 3.875,74.35 4.5,74.975 12.05,74.975 13.65,73.375 15.25,73.375 ; 10.725,68.9 10.725,74.9 ; U12.62@30.96,18.11 29.6,19.47 29.6,21.83 U12.58@30.96,23.19 ; U12.43@43.66,33.35 45.06,34.75 47.34,34.75 U12.39@48.74,33.35
  MidLayer1 w1.8: 10.75,44.725 10.75,68.875
  MidLayer1 w2: 7.625,25.55 7.625,41.6 10.75,44.725
  Bottom Layer w0.3: U12.46@41.12,30.81 43.125,28.805 R13.1@43.125,26.3
  Bottom Layer w0.6: R31.1@1,73 v1(1,74.35) ; 4.925,25.1 v3(7.6,25.1) ; I4.13@5.65,26.1 v3(7.625,26.1) ; I4.14@6,27.125 v3(7.625,27.125) ; RL1.2@8.851,3.635 8.851,5.449 ; v1(11.875,50.25) RR.2@13.225,50.25 ; v1(43.75,72.134) CV33.1@43.75,73.3 ; 47.55,44.325 47.55,38.5 48.75,37.3 CV23.1@48.75,35.05
  Bottom Layer w0.8: R28.1@1,43.4 R30.1@1,67.5 ; 1,44.55 3.45,44.55 4.425,43.575 ; 32.225,23.19 32.225,28.9 32.85,29.525 39.835,29.525 U12.46@41.12,30.81 ; U12.59@33.5,23.19 34.59,23.19 35.5,24.1 35.5,25.175 35.2,25.475 CV30.1@35.2,26 ; 35.525,24.6 U16.14@37.137,24.6 ; 36.04,29.585 U12.50@36.04,30.81 ; R43.1@51.875,37.5 R46.1@58.65,37.5
  Bottom Layer w1: 4.425,43.575 11.925,43.575 12.75,44.4 D3.A@14.5,44.4 ; 5.5,29.475 12.525,29.475 13.925,28.075 13.925,24.65 15.385,23.19 U12.59@33.5,23.19 ; U12.64@30.96,15.57 U12.62@30.96,18.11 ; U12.46@40.94,30.81 U12.46@41.12,30.81 U12.43@43.66,33.35 ; U12.40@48.74,30.81 51.28,28.27 U12.33@53.82,28.27 U12.31@53.82,25.73 ; U12.40@48.75,30.82 CV23.1@48.75,35.05 ; U12.39@48.75,33.35 U12.37@51.28,33.35
  Bottom Layer w1.5: 5.5,29.475 5.5,26.425 3.55,24.475 3.55,7.4 5.45,5.5 12.5,5.5 16.575,1.425 21.975,1.425 23.05,2.5 v4(48.75,2.5)
  other v1: 7.2,38.25 7.2,39.675 8.625,75.1 11.775,75.125 5.7,75.15
  other v2: 3.7,18 3.7,20.1 3.75,22.2 25.366,23.46 3.75,24.3 58.275,35.075 57.3,37.5
  other v5: 9.85,43.575
VCC_CPU: CN1.17 CN1.18 CN1.19 CV39.1 CV43.1 I4.9 I4.10 I4.11 | length 19.8
  Top Layer w1: v3@7.65,8.25 v3@9.125,8.25
  Bottom Layer w1.5: 6.375,23.6 6.375,21.45 5.5,20.575 5.5,9.5 6.75,8.25 CV43.1@8.875,8.25
  other v3: 7.9,8.25 8.9,8.25
pads on no net: b1.3 b1.4 CN1.0 I2.40 I2.42 I2.44 I4.0 U10.2 U10.4 U10.11 U10.12 U10.27 U10.28 U10.29 U10.40 U10.51 U10.53 U10.66 U10.67 U10.68 U10.88 U10.89 U10.90 U11.21 U11.52 U11.53 U11.54 U11.128 U11.129 U12.1 U12.10 U12.17 U12.18 U12.52 U12.57 U12.65 U12.67 U12.68 U16.8 U16.9 U17.6 U17.9 U17.10

## Polygon pours and split planes (outlines as drawn)
GND on Top Layer "Top Layer-No Net 1" (solid, remove dead copper, pour order 1000): 0,2.6 2.05,0.55 3.05,0.55 58.25,0.55 59.925,2.225 59.925,74.725 58.7,75.95 1.3,75.95 0.05,74.7
GND on MidLayer1 "Top Layer-No Net 1" (solid, remove dead copper, pour order 1001): 0.125,3 2.5,0.625 57.5,0.625 59.875,3 59.875,74.05 58.05,75.875 1.925,75.875 0.1,74.05
GND on Bottom Layer "Top Layer-No Net 1" (solid, remove dead copper, pour order 1002): 0.075,2.3 1.8,0.575 58.325,0.575 59.95,2.2 59.95,74.725 58.775,75.9 1.2,75.9 0.05,74.75
GND on GND (split plane): 58.29,75.458 58.569,75.373 58.826,75.236 59.051,75.051 59.236,74.826 59.373,74.569 59.458,74.29 59.485,74.015 59.482,74 59.482,2.5 59.485,2.485 59.458,2.21 59.373,1.931 59.236,1.674 59.051,1.449 58.826,1.264 58.569,1.127 58.29,1.042 58.015,1.015 58,1.018 2,1.018 1.985,1.015 1.71,1.042 1.431,1.127 1.174,1.264 0.949,1.449 0.764,1.674 0.627,1.931 0.542,2.21 0.515,2.485 0.518,2.5 0.518,74 0.515,74.015 0.542,74.29 0.627,74.569 0.764,74.826 0.949,75.051 1.174,75.236 1.431,75.373 1.71,75.458 1.985,75.485 2,75.482 58,75.482 58.015,75.485

## Silkscreen, mask and mechanical layers (free items; w line width, h text height)
Top Overlay:
  lines w0.15: 5.9,2 10,2 ; 17.425,2.025 17.425,0.775 21.425,0.775 21.425,2.025 ; 21.675,2.35 27.1,2.35 ; 24.35,0.775 24.35,4.025 ; 5.875,0.75 10,0.75 10,4 5.875,4 5.875,0.75 ; 21.675,0.775 21.675,4.025 27.1,4.025 27.1,0.775 21.675,0.775
  lines w0.2: 0,2.5 ccw(c2,2.5) 2,0.5 58,0.5 ccw(c58,2.5) 60,2.5 60,74 ccw(c58,74) 58,76 2,76 ccw(c2,74) 0,74 0,2.5
  text "IN" at 22.125,2.725 h0.8
  text "386" at 24.7,2.725 h0.8
  text "POWER" at 6.075,1 h0.8
  text "TYPE" at 17.95,1 h0.8
  text "OUT" at 22,1 h0.8
  text "486" at 24.7,1 h0.8